# Altium PCB 手电钻驱动板V0.1.PcbDoc
Units mil, origin at the board's own origin, x right, y up, seen from the top; angles counter-clockwise.
Board outline 3150 x 2425 mil, 2 copper layers (Top Layer, Bottom Layer); 105 components, 65 nets, 308 pads, 195 vias.
Unrouted connection lines stored in the file: 1.
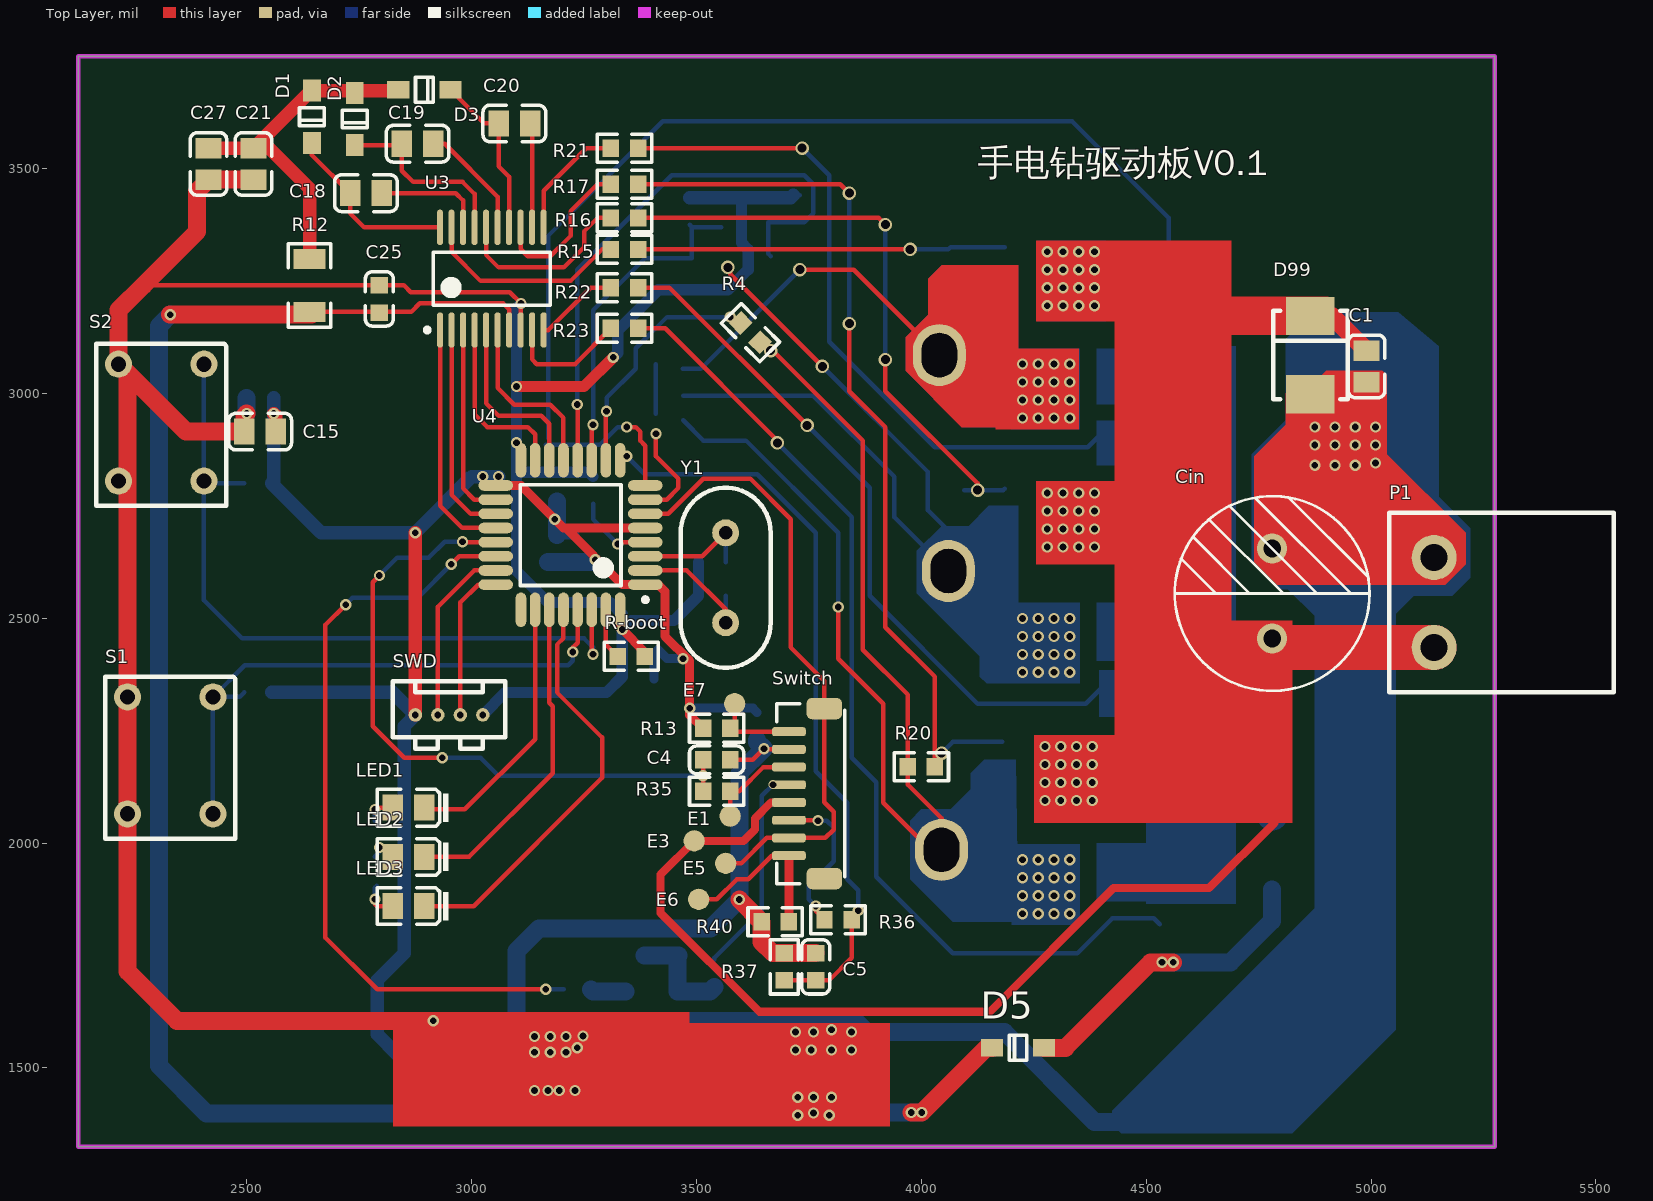
[diagram p0: Top Layer view]
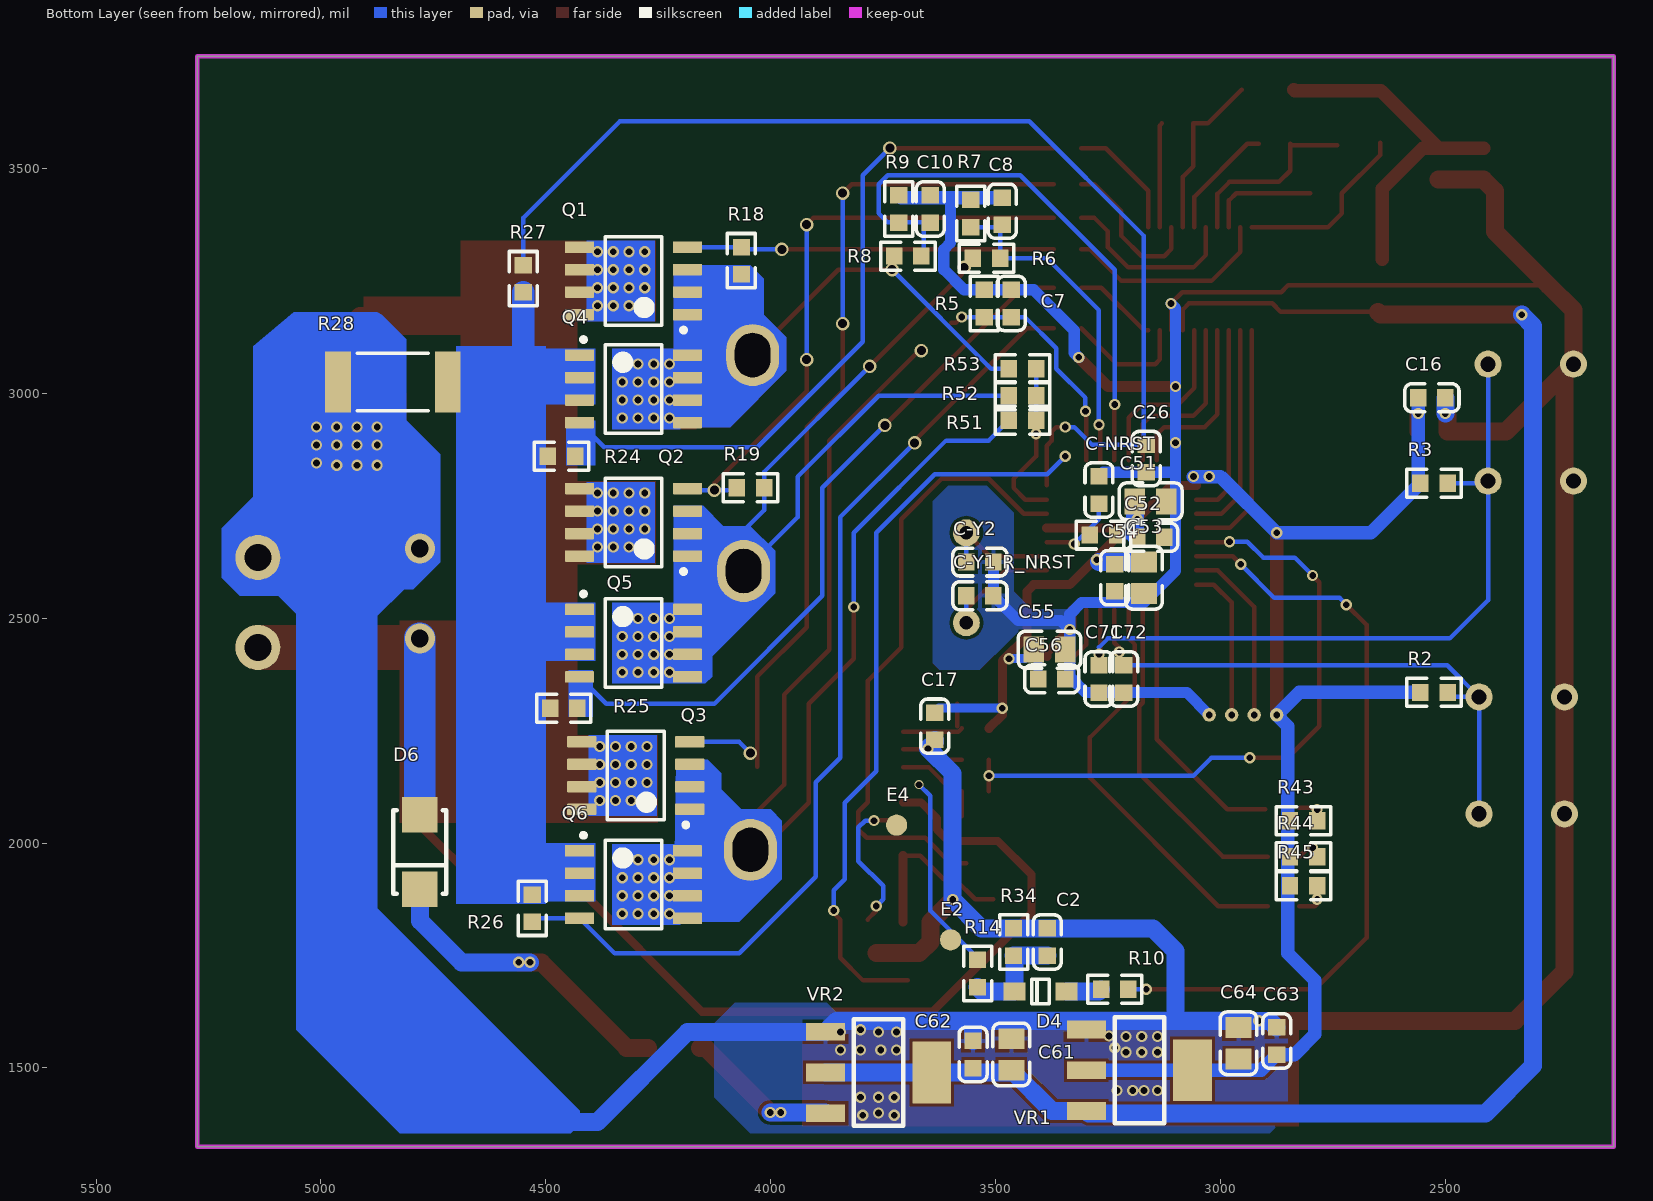
[diagram p1: Bottom Layer view, seen from below]
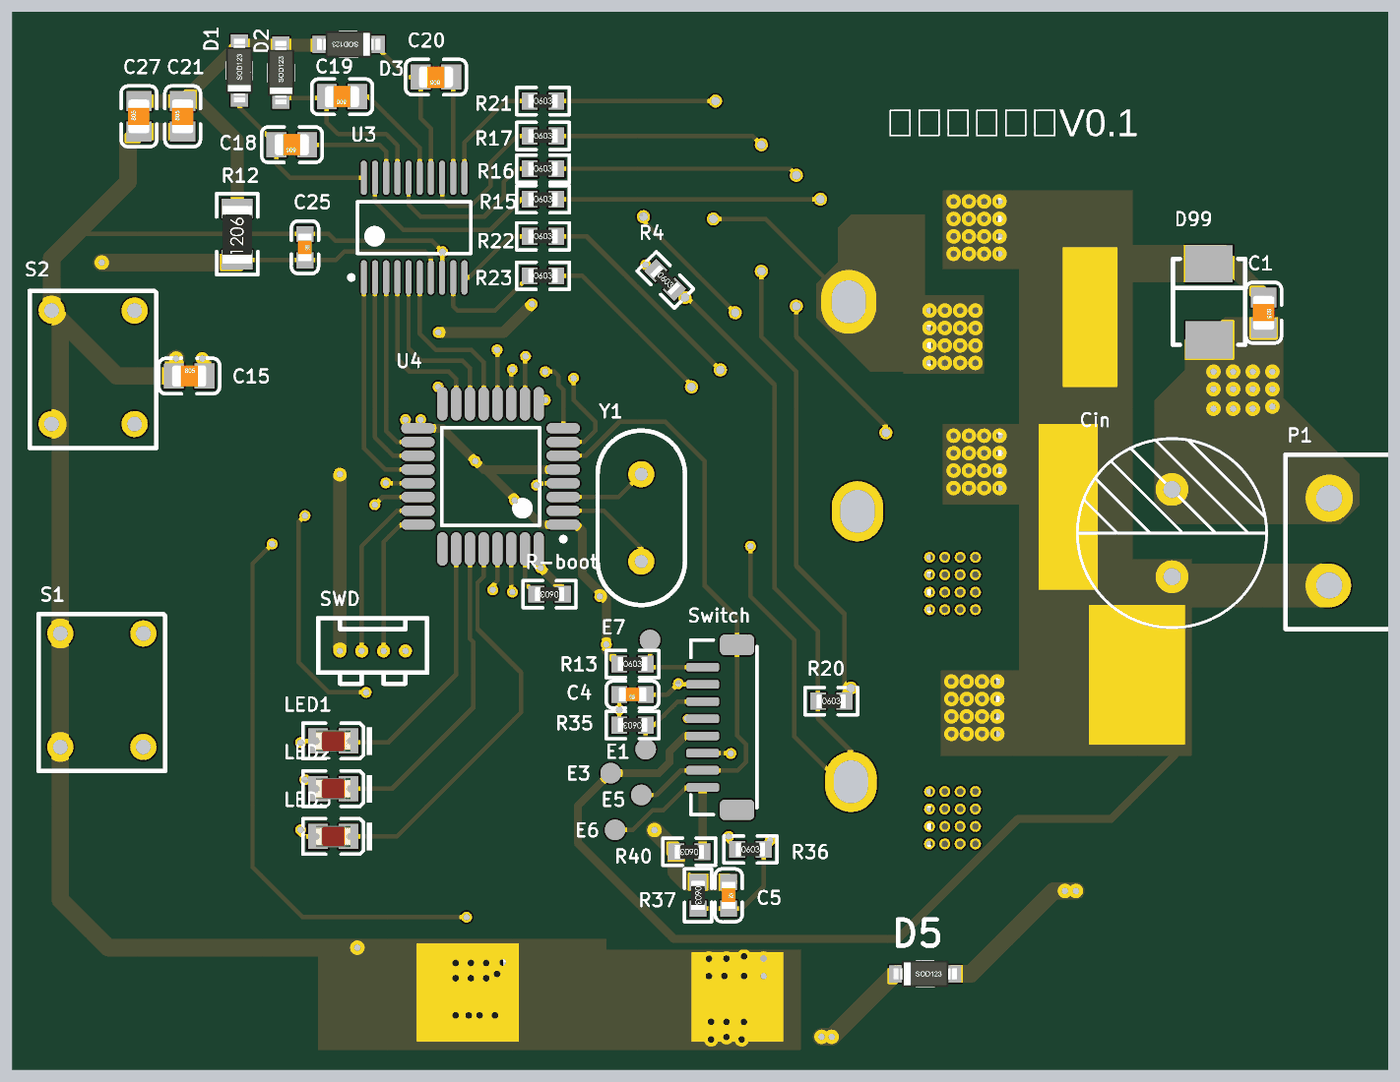
[diagram p2: 3D render of the assembled board from above, using the file's embedded part models]
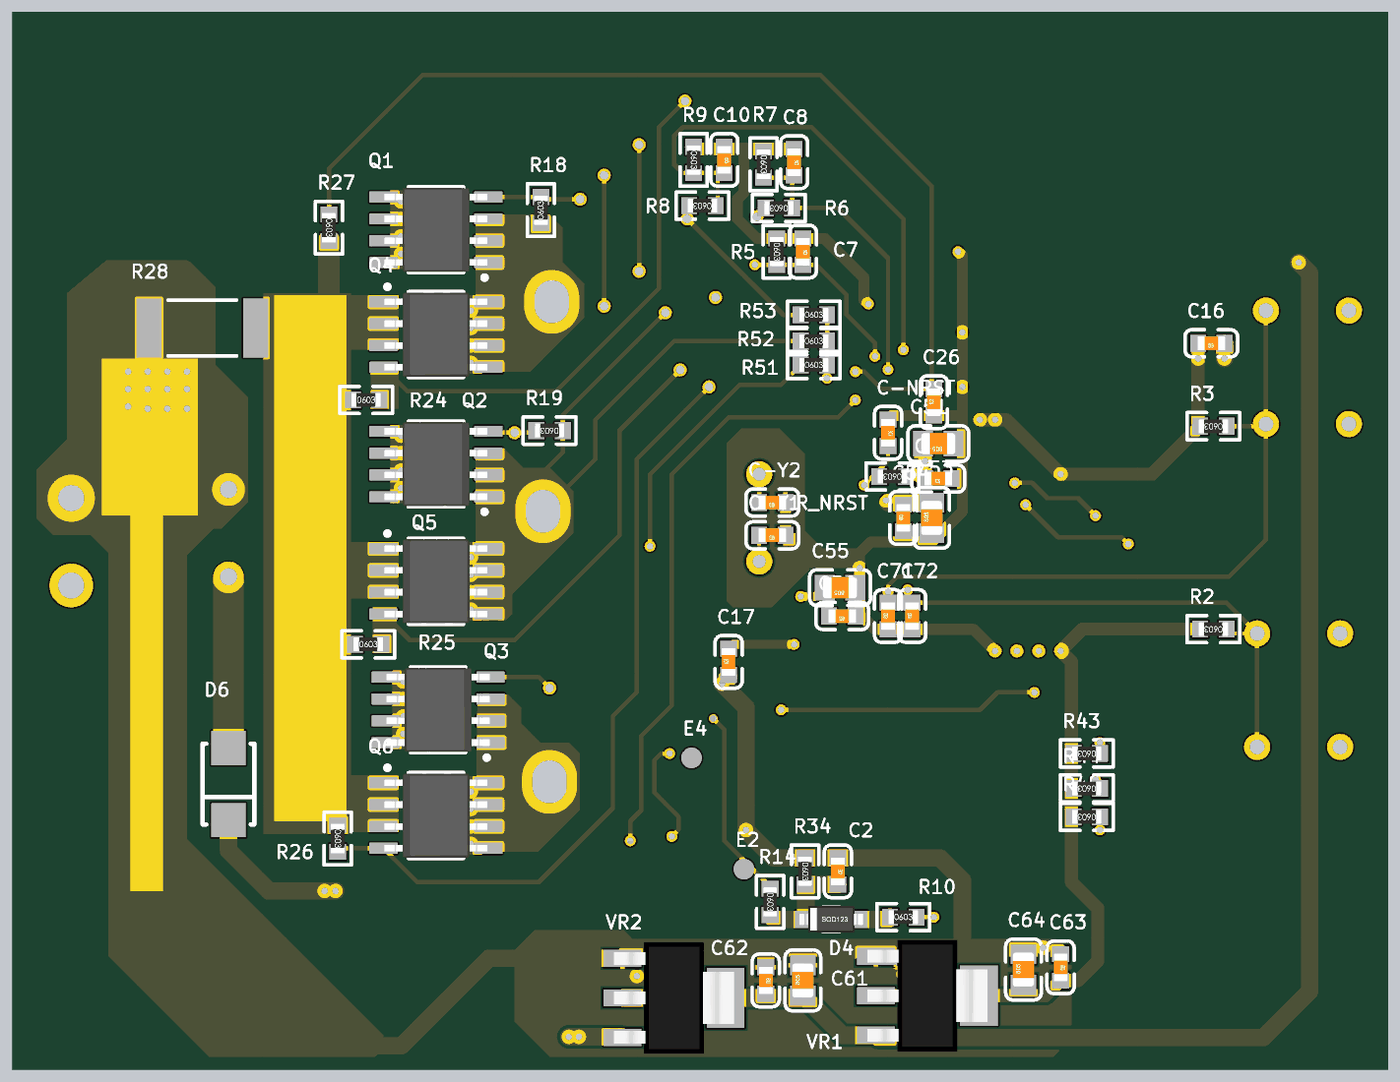
[diagram p3: 3D render of the assembled board from below, using the file's embedded part models]

## Layer stack, top to bottom
Top Layer: signal copper 1.4
Dielectric: dielectric 12.6, FR-4, Dk 4.8
Bottom Layer: signal copper 1.4

## Board outline
2125,1325 2125,3750 5275,3750 5275,1325

## Design rules (kind name [scope] priority, off if disabled: settings)
Clearance [All] p1: gap=7
PolygonConnect [All] p1: connectstyle=Relief reliefconductorwidth=10 reliefentries=4 polygonreliefangle="90 Angle"
RoutingVias [All] p1: holewidth=28 width=50 viastyle="Through Hole" minholewidth=28 minwidth=50 maxholewidth=28 maxwidth=50
SilkscreenOverComponentPads [IsPad] p1: minsilkscreentomaskgap=10
SolderMaskExpansion [All] p1: expansion=4
Width [All] p1: maxlimit=100 minlimit=10 preferedwidth=10 minimp=50.000000 maximp=50.000000 favimp=50.000000
27 further rules are at their usual default settings.

## Classes and differential pairs
component class U_Switch: C2 C4 C5 C17 D4 E1 E2 E3 E4 E5 E6 E7 R10 R13 R14 R34 R35 R36 R37 R40 Switch
component class U_POWER: C1 C61 C62 C63 C64 Cin D5 D6 D99 P1 VR1 VR2
component class U_MotoDriver: C7 C8 C10 C18 C19 C20 C21 C25 C26 C27 D1 D2 D3 Q1 Q2 Q3 Q4 Q5 Q6 R4 R5 R6 R7 R8 R9 R12 R15 R16 R17 R18 R19 R20 R21 R22 R23 R24 R25 R26 R27 R28 R51 R52 R53 U3
component class U_MCU_STM32: C51 C52 C53 C54 C55 C56 C-NRST C-Y1 C-Y2 R-boot R_NRST SWD U4 Y1
component class U_LED: LED1 LED2 LED3 R43 R44 R45
component class U_Key: C15 C16 C71 C72 R2 R3 S1 S2

## Components (designator, comment, footprint, x,y, rotation, side; value= is the part's Value field where it differs from the comment)
C1 "10uF 10% 50V" 0805_C 4990,3060 r270 top
C2 "0.1uF 10% 50V" 0603_C 3385,1780 r270 bottom
C4 "0.1uF 10% 50V" 0603_C 3545,2185 r180 top
C5 "0.1uF 10% 50V" 0603_C 3765,1725 r270 top
C7 "0.1uF 10% 50V" 0603_C 3465,3200 r270 bottom
C8 "0.1uF 10% 50V" 0603_C 3485,3405 r270 bottom
C10 "0.1uF 10% 50V" 0603_C 3645,3410 r270 bottom
C15 "10uF 10% 50V" 0805_C 2530,2915 r0 top
C16 "0.1uF 10% 50V" 0603_C 2530,2990 r0 bottom
C17 "0.1uF 10% 50V" 0603_C 3635,2260 r90 bottom
C18 "1uF 10% 50V" 0805_C 2765,3445 r180 top
C19 "1uF 10% 50V" 0805_C 2880,3555 r180 top
C20 "1uF 10% 50V" 0805_C 3095,3600 r180 top
C21 "10uF 10% 50V" 0805_C 2515,3510 r90 top
C25 "0.1uF 10% 50V" 0603_C 2795,3210 r270 top
C26 "0.1uF 10% 50V" 0603_C 3165,2855 r90 bottom
C27 "10uF 10% 50V" 0805_C 2415,3510 r90 top
C51 "10uF 10% 50V" 0805_C 3155,2760 r0 bottom
C52 "0.1uF 10% 50V" 0603_C 3155,2680 r0 bottom
C53 "10uF 10% 50V" 0805_C 3170,2590 r90 bottom
C54 "0.1uF 10% 50V" 0603_C 3235,2590 r90 bottom
C55 "10uF 10% 50V" 0805_C 3380,2430 r0 bottom
C56 "0.1uF 10% 50V" 0603_C 3375,2365 r0 bottom
C61 "10uF 10% 50V" 0805_C 3465,1530 r90 bottom
C62 "0.1uF 10% 50V" 0603_C 3550,1530 r270 bottom
C63 "0.1uF 10% 50V" 0603_C 2875,1560 r270 bottom
C64 "10uF 10% 50V" 0805_C 2960,1555 r90 bottom
C71 "0.1uF 10% 50V" 0603_C 3270,2365 r90 bottom
C72 "0.1uF 10% 50V" 0603_C 3215,2365 r90 bottom
C-NRST "0.1uF 10% 50V" 0603_C 3270,2785 r270 bottom
C-Y1 "22pF 10% 50V" 0603_C 3535,2550 r0 bottom
C-Y2 "22pF 10% 50V" 0603_C 3535,2625 r0 bottom
Cin "330uF 35V电解电容" 330uf/35V 4780,2455 r90 top
D1 "1N5819W  SL" SOD-123 2645,3615 r90 top
D2 "1N5819W  SL" SOD-123 2740,3610 r90 top
D3 "1N5819W  SL" SOD-123 2895,3675 r180 top
D4 "1N5819W  SL" SOD-123 3400,1670 r180 bottom
D5 "1N5819W  SL" SOD-123 4215,1545 r0 top
D6 "ES2JA" SMA(DO-214AC)_S1 4780,1980 r90 bottom
D99 "SMBJ 240A" SMB(DO-214AA)_S1 4865,3085 r270 top
E1 "测试点" Test 3575,2060 r0 top
E2 "测试点" Test 3600,1785 r180 bottom
E3 "测试点" Test 3495,2005 r0 top
E4 "测试点" Test 3720,2040 r180 bottom
E5 "测试点" Test 3565,1955 r0 top
E6 "测试点" Test 3505,1875 r0 top
E7 "测试点" Test 3585,2310 r0 top
LED1 "翠绿 0805" 0805_LED_S1 2860,2078.7 r180 top
LED2 "翠绿 0805" 0805_LED_S1 2860,1969.33 r180 top
LED3 "翠绿 0805" 0805_LED_S1 2860,1859.96 r180 top
P1 "Header 2" 2星座子 5140,2635 r270 top
Q1 "TPCA8057-H" TPCA8057-H 4305,3250 r0 bottom
Q2 "TPCA8057-H" TPCA8057-H 4305,2713.23 r0 bottom
Q3 "TPCA8057-H" TPCA8057-H 4300,2150 r0 bottom
Q4 "TPCA8057-H" TPCA8057-H 4305,3010 r180 bottom
Q5 "TPCA8057-H" TPCA8057-H 4305,2444.65 r180 bottom
Q6 "TPCA8057-H" TPCA8057-H 4305,1907.87 r180 bottom
R2 "4.7KΩ ±10%" 0603_R 2525,2335 r0 bottom
R3 "4.7KΩ ±10%" 0603_R 2525,2800 r0 bottom
R4 "20KΩ ±1%" 0603_R 3620,3135 r315 top
R5 "2.4KΩ ±1%" 0603_R 3525,3200 r270 bottom
R6 "20KΩ ±1%" 0603_R 3520,3300 r0 bottom
R7 "2.4KΩ ±1%" 0603_R 3555,3400 r270 bottom
R8 "20KΩ ±1%" 0603_R 3695,3305.32 r0 bottom
R9 "2.4KΩ ±1%" 0603_R 3715,3410 r270 bottom
R10 "81Ω ±1%" 0603_R 3235,1675 r180 bottom
R12 "511Ω ±1%" 1206_R 2640,3240 r90 top
R13 "100Ω ±1%" 0603_R 3545,2255 r0 top
R14 "51KΩ ±10%" 0603_R 3540,1710 r270 bottom
R15 "51Ω ±1%" 0603_R 3340,3320 r0 top
R16 "51Ω ±1%" 0603_R 3340,3390 r0 top
R17 "51Ω ±1%" 0603_R 3340,3465 r0 top
R18 "100KΩ ±10%" 0603_R 4065,3295 r90 bottom
R19 "100KΩ ±10%" 0603_R 4045,2790 r0 bottom
R20 "100KΩ ±10%" 0603_R 4000,2170 r0 top
R21 "51Ω ±1%" 0603_R 3340,3545 r0 top
R22 "51Ω ±1%" 0603_R 3340,3235 r0 top
R23 "51Ω ±1%" 0603_R 3340,3144.61 r0 top
R24 "100KΩ ±10%" 0603_R 4465,2860 r180 bottom
R25 "100KΩ ±10%" 0603_R 4460,2300 r180 bottom
R26 "100KΩ ±10%" 0603_R 4530,1855 r270 bottom
R27 "81Ω ±1%" 0603_R 4550,3255 r270 bottom
R28 "0.002Ω ±1%" RESC2512(6432)_M 4840,3025 r180 bottom
R34 "10KΩ ±10%" 0603_R 3460,1780 r270 bottom
R35 "81Ω ±1%" 0603_R 3545,2115 r180 top
R36 "81Ω ±1%" 0603_R 3815,1830 r0 top
R37 "1MΩ ±10%" 0603_R 3695,1725 r270 top
R40 "81Ω ±1%" 0603_R 3675,1825 r180 top
R43 "270Ω ±10%" 0603_R 2815,2050 r0 bottom
R44 "270Ω ±10%" 0603_R 2815,1970 r0 bottom
R45 "270Ω ±10%" 0603_R 2815,1905 r0 bottom
R51 "20KΩ ±1%" 0603_R 3440,2940 r180 bottom
R52 "20KΩ ±1%" 0603_R 3440,2995 r180 bottom
R53 "20KΩ ±1%" 0603_R 3440,3055 r180 bottom
R-boot "10KΩ ±10%" 0603_R 3355,2415 r180 top
R_NRST "10KΩ ±10%" 0603_R 3260,2685 r0 bottom
S1 "SW-DPST" SW1 2235,2325 r0 top
S2 "SW-DPST" SW1 2215,3065 r0 top
SWD "Header 4" FPC_1.25_4P 3025,2285 r180 top
Switch "Header 8" SH1.0mm-8P 3745,2110 r90 top
U3 "FD6288T" TSSOP20_M 3045,3255 r90 top
U4 "STM32F030K6T6" STM-LQFP32_M 3220,2685 r180 top
VR1 "AMS1117-5.0" SOT-223 3180,1495 r0 bottom
VR2 "AMS1117-5.0" SOT-223 3760,1490 r0 bottom
Y1 "8M" XTAL 3565,2590 r90 top

## Footprints (in the part's own frame and the unit in brackets; to place one, negate y for a bottom-side part, rotate by r counter-clockwise, add the part's x,y. Pads: shape width x height; smd on the part's side, far side on the other; paste and mask are expansions set on the pad)
2星座子 [mil]
  round 100 hole 60: 1(0,0) 2(200,0)
  silkscreen extent -100,-100 300,400
330uf/35V [mm]
  round 1.7 hole 1: 1(0,0) 2(5.08,0)
  silkscreen extent -2.96,-5.5 8.04,5.5
0603_C [mm]
  rect 0.93x0.98 smd: 1(-0.77,0) 2(0.77,0)
  silkscreen extent -1.53,-0.79 1.54,0.79, body extent -0.8,-0.4 0.8,0.4, height 0.3
0603_R [mm]
  rect 0.93x0.98 smd: 1(-0.77,0) 2(0.77,0)
  silkscreen extent -1.53,-0.79 1.54,0.79, body extent -0.85,-0.4 0.85,0.4, height 0.56
0805_C [mm]
  rect 1.16x1.47 smd: 1(-0.89,0) 2(0.89,0)
  silkscreen extent -1.77,-1.04 1.77,1.04, body extent -1,-0.63 1,0.63, height 0.77
0805_LED_S1 [mm]
  rect 1.16x1.47 smd: A(0.89,0) K(-0.89,0)
  silkscreen extent -2.25,-1.04 1.77,1.03, body extent -1.01,-0.63 1.01,0.62, height 1.1
1206_R [mm]
  rect 1.13x1.8 smd: 1(-1.49,0) 2(1.49,0)
  silkscreen extent -2.36,-1.2 2.35,1.2, body extent -1.7,-0.86 1.65,0.87, height 0.85
FPC_1.25_4P [mil]
  round 30 hole 15: 1(0,0) 2(50,0) 3(100,0) 4(150,0)
  silkscreen extent -50,-75 200,75
RESC2512(6432)_M [mm] "Chip Resistor, Body 6.4x3.2mm, IPC Low Density"
  rect 1.45x3.45 smd: 1(-3.1,0) 2(3.1,0)
  silkscreen extent -2,-1.63 2,1.63, body extent -3.25,-1.7 3.25,1.7, height 0.75
SH1.0mm-8P [mm] "Header, Wire-to-Board, SMT, Horizontal, 1-Row, Pitch 1.00mm, 2-Position"
  rrect50% 1.2x2 smd: 0(-4.8,-1) 0(4.8,-1)
  rrect50% 0.5x1.9 smd: 1(-3.5,1) 2(-2.5,1) 3(-1.5,1) 4(-0.5,1) 5(0.5,1) 6(1.5,1) 7(2.5,1) 8(3.5,1)
  silkscreen extent -5.08,-2.16 5.08,1.69
SMA(DO-214AC)_S1 [mm]
  rect 2x2 smd: 1(2.1,0) 2(-2.1,0)
  silkscreen extent -2.35,-1.5 2.35,1.5
SMB(DO-214AA)_S1 [mil]
  rect 85x107.99 smd: 1(87.01,0) 2(-87.01,0)
  silkscreen extent -98,-83 98,83
SOD-123 [mm]
  rect 1.25x1 smd: 1(1.475,0) 2(-1.475,0)
  silkscreen extent -0.5,-0.7 0.5,0.7, body extent -1.85,-0.77 1.85,0.78, height 1.35
SOT-223 [mm]
  rect 2.2x1 smd: 1(3,-2.3) 2(3,0) 3(3,2.3)
  rect 2.2x3.5 smd: 2(-3,0)
  silkscreen extent -1.4,-3 1.4,3, body extent -3.49,-3.24 3.49,3.24, height 1.64
STM-LQFP32_M [mm] "QFP, 32-Leads, Body 7x7mm, Pitch 0.8mm, IPC Low Density"
  oval 1.95x0.6 smd: 1(-4.225,2.8) 2(-4.225,2) 3(-4.225,1.2) 4(-4.225,0.4) 5(-4.225,-0.4) 6(-4.225,-1.2) 7(-4.225,-2) 8(-4.225,-2.8) 17(4.225,-2.8) 18(4.225,-2) 19(4.225,-1.2) 20(4.225,-0.4) 21(4.225,0.4) 22(4.225,1.2) 23(4.225,2) 24(4.225,2.8)
  oval 0.6x1.95 smd: 9(-2.8,-4.225) 10(-2,-4.225) 11(-1.2,-4.225) 12(-0.4,-4.225) 13(0.4,-4.225) 14(1.2,-4.225) 15(2,-4.225) 16(2.8,-4.225) 25(2.8,4.225) 26(2,4.225) 27(1.2,4.225) 28(0.4,4.225) 29(-0.4,4.225) 30(-1.2,4.225) 31(-2,4.225) 32(-2.8,4.225)
  silkscreen extent -4.35,-2.85 2.85,3.77, body extent -3.5,-3.5 3.5,3.5, height 1.6
SW1 [mil]
  round 60 hole 34: 1(0,-260) 2(190,-260) 3(0,0) 4(190,0)
  silkscreen extent -50,-315 240,45
Test [mm] "Test"
  round 1.2 smd: 1(0,0)
TPCA8057-H [mm] "SOIC, 8-Leads, Body 5x5mm, Pitch 1.27mm, IPC Low Density"
  rrect15% 1.65x0.65 smd: 1(-3.048,1.905) 2(-3.048,0.635) 3(-3.048,-0.635) 4(-3.048,-1.905) 5(3.048,-1.905) 6(3.048,-0.635) 7(3.048,0.635) 8(3.048,1.905)
  Top Layer region: -1.214,2.286 2.667,2.286 2.667,-2.286 -1.214,-2.286
  silkscreen extent -2.95,-2.5 1.6,2.9, body extent -3,-2.45 3,2.45, height 1.63
TSSOP20_M [mm] "TSOP, 20-Leads, Body 6.5x4.4mm, Pitch 0.65mm, IPC Low Density"
  oval 2x0.35 smd: 1(-2.9,2.925) 2(-2.9,2.275) 3(-2.9,1.625) 4(-2.9,0.975) 5(-2.9,0.325) 6(-2.9,-0.325) 7(-2.9,-0.975) 8(-2.9,-1.625) 9(-2.9,-2.275) 10(-2.9,-2.925) 11(2.9,-2.925) 12(2.9,-2.275) 13(2.9,-1.625) 14(2.9,-0.975) 15(2.9,-0.325) 16(2.9,0.325) 17(2.9,0.975) 18(2.9,1.625) 19(2.9,2.275) 20(2.9,2.925)
  silkscreen extent -3.02,-3.3 1.5,3.77, body extent -2.25,-3.3 2.25,3.3, height 1.2
XTAL [mil]
  round 60 hole 30: 1(-100,0) 2(100,0)
  silkscreen extent -200,-100 200,100

## Part data
C1 C61 C62 C63 C64: library part "Cap Semi", "Capacitor (Semiconductor SIM Model)"
C2 C4 C5 C7 C8 C10 C15 C16 C17 C25 C26 C27 C52 C54 C56 C71 C72 C-NRST C-Y1 C-Y2: library part "0603 4.7uF (475) 10% 16V", "贴片电容"
C18 C19 C20 C21 C51 C53 C55: library part "0805 1uF (105) 10% 50V", "贴片电容"
Cin: library part "Cap Pol1", "Polarized Capacitor (Radial)"
D1 D2 D3 D4 D5: library part "SOD-123 B5819W  SL", "肖特基二极管"
D6: library part "SMA(DO-214AC) M7", "二极管"
D99: library part "SMB/DO-214AA P6SMB6.8CA", "TVS"
E1 E2 E3 E4 E5 E6 E7: library part Antenna, "Generic Antenna"
LED1 LED2 LED3: library part "0805 翠绿", "发光二极管"
P1: "Header, 2-Pin"
Q1 Q2 Q3 Q4 Q5 Q6: "MOSFETsSilicon N-Channel MOS (U-MOSªÓ-H)"
R2 R3 R4 R5 R6 R7 R8 R9 R10 R13 R14 R15 R16 R17 R18 R19 R20 R21 R22 R23 R24 R25 R26 R27 R28 R34 R35 R36 R37 R40 R43 R44 R45 R51 R52 R53 R-boot R_NRST: library part "0603 2.2Ω (2R20) 1%", "贴片电阻"
R12: library part "0402 51Ω (51R0) 1%", "贴片电阻"
S1 S2: "Double-Pole, Single-Throw Switch"
SWD: "Header, 4-Pin"
Switch: "Header, 8-Pin"
U3: "USB to TTL Serial / UART"
U4: library part MC-ARM-STM32F030-SQ32
VR1 VR2: library part "SOT-223 AMS1117-5.0", "低压差线性稳压(LDO)"
Y1: library part XTAL, "Crystal Oscillator"

## Free pads (board coordinates)
  oval 118.11x137.8 hole 78.74 slot 98.43 at 90 deg: 0(4040,3085) 0(4045,1985) 0(4060,2605)

## Via types
v1: diameter 25, hole 15, Top Layer to Bottom Layer, 180 vias
v2: diameter 30, hole 20, Top Layer to Bottom Layer, 14 vias
v3: diameter 20, hole 15, Top Layer to Bottom Layer, 1 vias

## Nets (pads, with @x,y where several pads share a name; then routed paths per layer and width w, separated by ;. In a path a pad name is that pad's centre, name@x,y a point inside that pad or via, vN(x,y) a via of type N, cw(c..) or ccw(c..) an arc to the next point about the centre after c; other vN are vias at no path point)
3v3: C15.2 C16.2 C17.2 C51.2 C52.2 C53.2 C54.2 C55.2 C56.2 C63.2 C64.1 R2.2 R3.2 R13.1 R43.2 R44.2 R45.2 R_NRST.1 SWD.4 U4.1 U4.5 U4.17 VR1.2 | length 4362
  Top Layer w20: U4.17 3109.76,2795.24 v1(3185,2720) 3204.25,2700.75 ; U4.5 3209.25,2700.75 3335.24,2574.76 U4.1 3415.24,2574.76 3430,2560 3430,2460 3485,2405 v1(3485,2300) 3485,2284.69 R13.1
  Top Layer w30: v1(2560,2955) 2565.04,2949.96 C15.2 ; SWD.4 v1(2875,2690)
  Bottom Layer w20: C52.2 3190.04,2684.72 3190.32,2685 R_NRST.1 ; C56.2 3405.32,2420.28 C55.2 3435.04,2410 v1(3470,2410) ; v1(3485,2300) 3625.32,2300 C17.2
  Bottom Layer w30: R2.2 2825,2335 SWD.4 2850,2260 2850,1755 2790,1695 2790,1575 2835.32,1529.68 C63.2 2909.68,1495 3061.89,1495 VR1.2@3298.11,1495 ; C16.2 2560.32,2805 R3.2 2665.32,2690 v1(2875,2690) 3000,2815 v1(3025,2815) v1(3060,2815)
  Bottom Layer w40: C53.2 v1@3270.04,2625.04 ; C52.2@3190.04,2684.72 C51.2
  other v1: 3275,2630
CURRENT_AD: C26.2 R27.1 U4.8 | length 2484.4
  Top Layer w10: v1(3345,2925) 3365,2925 3375,2915 3375,2895 3386.34,2883.66 U4.8
  Bottom Layer w10: C26.2 3285.32,2885.32 3325,2925 v1(3345,2925) ; C26.2@3170,2900 3170,3350 3425,3605 4335,3605 4550,3390 R27.1
GND: C1.2 C2.1 C4.1 C5.1 C7.1 C8.1 C10.1 C15.1 C16.1 C17.1 C21.1 C25.1 C26.1 C27.1 C51.1 C52.1 C53.1 C54.1 C55.1 C56.1 C61.2 C62.1 C63.1 C64.2 C71.1 C72.1 C-NRST.1 C-Y1.1 C-Y2.1 Cin.2 D99.1 P1.1 R5.1 R7.1 R9.1 R28.1 R34.1 R37.1 R40.2 R-boot.1 S1.1 S1.3 S2.1 S2.3 SWD.1 Switch.7 U3.8 U4.16 U4.32 VR1.1 VR2.1 | length 10314.8
  Top Layer w10: 2270.32,3240.32 C25.1 2849.68,3240.32 2865,3225 3085,3225 v1(3110,3200) 3108.98,3198.98 U3.8 ; C4.1 3625,2185 v1@3648.42,2208.42 ; v1@3650,2208.42 Switch.7
  Top Layer w20: U4.32 3330.24,2479.76 v1(3335,2475) 3385.31,2424.69 R-boot.1
  Top Layer w25: v1(3100,3015) 3250,3015 v1(3315,3080)
  Top Layer w40: v1(2500,2955) 2494.96,2949.96 C15.1 2365,2915 S2.3@2235,3045 ; C21.1 C27.1 2390,3449.96 2390,3360 2270.32,3240.32 2215,3185 S2.3 S2.3@2235,3045 ; v1(2915,1605) 2345,1605 2235,1715 S1.1 S1.3 S2.3@2235,3045 ; v1(3595.2,1874.49) R40.2 3644.68,1780.32 3669.68,1755.32 C5.1 ; D99.1 4963.03,2997.99 C1.2
  Bottom Layer w10: C8.1 C8.1@3490,3430.31 ; R9.1@3715,3440.63 R9.1@3730,3440.63
  Bottom Layer w25: SWD.1 3074.68,2334.68 C72.1 C71.1 3299.68,2334.68 3335,2370 v1(3335,2475) ; v1(3110,3200) 3100,3190 v1(3100,3015) v1(3100,2890) 3100,2830 ; C-NRST.1 3260.63,2824.68 C26.1 3105.32,2824.68 3100,2830 ; v1(3315,3080) 3325,3090 3325,3140 3415.32,3230.32 C7.1 3570.32,3230.32 3615,3275 3615,3320 3600,3335 3600,3435.32 ; C-Y2.1 C-Y1.1 3449.68,2495 3355,2495 v1(3335,2475) ; 3100,2830 3100,2605 3170,2535 3308.66,2535 3335,2508.66 v1(3335,2475)
  Bottom Layer w30: C8.1 3600,3435.32 3710,3435.32 R9.1
  Bottom Layer w40: v1@2499.68,2955.32 C16.1 ; C63.1 2889.68,1605 v1(2915,1605) 3100,1605 ; C62.1 3550,1600 3545,1605 ; C17.1 3635,2225 v1(3650,2210) 3595.2,2155.2 v1(3595.2,1874.49) 3531.02,1810.31 R34.1 C2.1 3150.32,1810.32 3100,1760 3100,1605 ; 4450,1380 4385,1380 4184.45,1580.55 VR2.1 3853.66,1605 3800,1605 3545,1605 ; 3100,1605 3545,1605
  other v1: 3725,1395 3795,1395 3760,1400 3725,1435 3760,1435 3800,1435 3140,1450 3170,1450 3195,1450 3230,1450 3140,1535 3175,1535 3210,1535 3720,1540 3755,1540 3800,1540 3845,1540 3235,1545 3140,1570 3175,1570 3210,1570 3247.8,1570.9 3720,1580 3760,1580 3845,1580 3800,1585 4875,2840 4920,2840 4965,2840 5010,2845 4875,2885 4920,2885 4965,2885 5010,2885 4875,2925 4920,2925 4965,2925 5010,2925
GND1: Q4.1 Q4.2 Q4.3 Q5.1 Q5.2 Q5.3 Q6.1 Q6.2 Q6.3 R24.1 R25.1 R26.1 R27.2 R28.2 | length 144.7
  Bottom Layer w50: 4550,3080 R27.2
HIN1: U3.1 U4.20 | length 535
  Top Layer w10: U3.1 2929.84,2750.16 2979.25,2700.75 U4.20
HIN2: U3.2 U4.19 | length 482
  Top Layer w10: U3.2 2955.43,2774.57 2997.76,2732.24 U4.19
HIN3: U3.3 U4.18 | length 434.9
  Top Layer w10: U3.3 2981.02,2788.98 3006.26,2763.74 U4.18
HO1: R15.1 U3.19 | length 464.6
  Top Layer w10: U3.19 2955.43,3314.57 3020,3250 3220,3250 3290,3320 R15.1
HO2: R16.1 U3.16 | length 416.4
  Top Layer w10: U3.16 3032.2,3307.8 3060,3280 3205,3280 3250,3325 3250,3360 3280,3390 R16.1
HO3: R17.1 U3.13 | length 354
  Top Layer w10: U3.13 3108.98,3321.02 3125,3305 3175,3305 3220,3350 3220,3405 3280,3465 R17.1
KEY1: C72.2 R2.1 S1.2 S1.4 U4.29 | length 1274.9
  Top Layer w10: v1@3225,2435 3235.75,2445.75 U4.29
  Bottom Layer w10: S1.2 S1.4 ; R2.1 2484.69,2325 S1.4 ; v1(3225,2425) 3225,2405.32 C72.2 2495.32,2395.32 S1.4
KEY2: C71.2 R3.1 S2.2 S2.4 U4.30 | length 1621.2
  Top Layer w10: v1@3267.24,2422.76 U4.30
  Bottom Layer w10: S2.4 S2.2 ; R3.1 2410,2800 S2.2 ; 3270,2435 3250,2455 2490,2455 2405,2540 S2.2
  other v1: 3270,2420
LED1: LED1.K U4.26 | length 593.4
  Top Layer w10: LED1.K@2900,2075 2985,2075 3141.26,2231.26 U4.26
LED2: LED2.K U4.27 | length 729.1
  Top Layer w10: LED2.K 2994.33,1969.33 3180.67,2155.67 3180.67,2304.33 3172.76,2312.24 U4.27
LED3: LED3.K U4.28 | length 934
  Top Layer w10: LED3.K 3004.96,1859.96 3290.04,2145.04 3290.04,2234.96 3190,2335 3190,2441.5 3204.25,2455.75 U4.28
LED_CTRL: E5.1 Switch.0@3784.37,2298.98 Switch.2 U4.6 | length 1393.6
  Top Layer w10: U4.6 3437.24,2732.24 3515,2810 3620,2810 3710,2720 3710,2435 3784.37,2360.63 3784.37,2298.98 3784.37,2090.63 3805,2070 3805,2030 3786.57,2011.57 Switch.2 3656.57,2011.57 3600,1955 E5.1
LIN1: U3.4 U4.15 | length 398
  Top Layer w10: U3.4 3006.61,2953.39 3035,2925 3125,2925 3141.26,2908.74 U4.15
LIN2: U3.5 U4.14 | length 403.4
  Top Layer w10: U3.5 3032.2,2977.8 3060,2950 3155,2950 3172.76,2932.24 U4.14
LIN3: U3.6 U4.13 | length 397
  Top Layer w10: U3.6 3057.8,3012.2 3095,2975 3175,2975 3204.25,2945.75 U4.13
LO1: R21.1 U3.11 | length 269.8
  Top Layer w10: U3.11 3160.16,3450.16 3255,3545 R21.1
LO2: R22.1 U3.10 | length 188.5
  Top Layer w10: U3.10 3170.83,3140.83 3265,3235 R22.1
LO3: R23.1 U3.9 | length 277.8
  Top Layer w10: U3.9 3134.57,3075.43 3145,3065 3230.08,3065 R23.1
MID_AD: R51.2 R52.2 R53.2 U4.7 | length 335.5
  Top Layer w10: U4.7 3433.74,2763.74 3460,2790 3460,2810 3410,2860 v1(3410,2910)
  Bottom Layer w10: R51.2@3409.68,2954.72 R52.2 R53.2 R53.2@3409.68,3065
MOTO_AD_A: C7.2 R4.1 R5.2 U4.10 | length 543.8
  Top Layer w10: U4.10 3298.74,2958.74 v1(3300,2960) ; v1(3575,3170) 3588.56,3156.44 R4.1
  Bottom Layer w10: v1(3300,2960) 3300,2990 3365,3055 3365,3100 3434.68,3169.68 R5.2 v1@3574.68,3169.68
MOTO_AD_B: C8.2 R6.1 R7.2 U4.11 | length 743.7
  Top Layer w10: U4.11 3267.24,2927.24 v1(3270,2930)
  Bottom Layer w10: v1(3270,2930) 3270,3185 3385,3300 R6.1 3489.69,3370 C8.2 ; C8.2@3490,3369.68 R7.2
MOTO_AD_C: C10.2 R8.1 R9.2 U4.12 | length 1284.2
  Top Layer w10: v1@3235,2965 3235.75,2964.25 U4.12
  Bottom Layer w10: v1(3235,2975) 3235,3275 3445,3485 3740,3485 3760,3465 3760,3400 3740,3380 3730,3380 3660,3380 3660,3310 R8.1
NetC2_2: C2.2 D4.2 R14.2 R34.2 | length 241.4
  Bottom Layer w40: C2.2 R34.2 3458.07,1747.76 D4.2 3530.32,1670 R14.2
NetC-Y1_2: C-Y1.2 U4.2 Y1.1 | length 304.5
  Top Layer w10: U4.2 3478.74,2606.26 3565,2520 Y1.1
  Bottom Layer w10: Y1.1 3565.32,2490.32 C-Y1.2
NetC-Y2_2: C-Y2.2 U4.3 Y1.2 | length 265.4
  Top Layer w10: U4.3 3512.76,2637.76 Y1.2
  Bottom Layer w10: Y1.2 3565,2625.32 C-Y2.2
NetD4_1: D4.1 R10.1 | length 78.7
  Bottom Layer w40: R10.1 3270.31,1670 D4.1
NetD5_1: D5.1 D6.2 | length 718.9
  Top Layer w40: D5.1 4320,1545 4510,1735 v1(4560,1735)
  Bottom Layer w40: v1(4535,1735) 4687.68,1735 4780,1827.32 D6.2
NetE1_1: E1.1 R35.1 Switch.6 | length 207.8
  Top Layer w10: E1.1 3575,2114.69 R35.1 3595,2115 3649.05,2169.05 Switch.6
NetE2_1: E2.1 R14.1 Switch.5 | length 443.5
  Bottom Layer w10: R14.1 3540,1745 3645,1850 3645,2105 v3(3670,2130)
NetE4_1: E4.1 R36.1 Switch.3 | length 354.8
  Top Layer w10: Switch.3 v1@3770,2050.94 ; v1(3765,1860) 3765,1849.69 R36.1
  Bottom Layer w10: v1@3770,1865 v1(3765,1860) 3750,1875 3750,1905 3805,1960 3805,2035 3790,2050 v1(3770,2050)
NetE6_1: E6.1 R40.1 Switch.1 | length 388.2
  Top Layer w10: E6.1 3545,1875 3590,1920 3615,1920 3667.2,1972.2 Switch.1
  Top Layer w20: R40.1 3705.63,1825.32 Switch.1
NetE7_1: E7.1 R13.2 Switch.8 | length 183.3
  Top Layer w10: R13.2 3582.52,2247.79 Switch.8 ; R13.2@3585,2260 E7.1
NetLED1_A: LED1.A R43.1 | length 61.4
  Top Layer w10: v1@2788.7,2078.7 LED1.A
  Bottom Layer w10: R43.1 2785,2050.31 v1(2785,2075)
NetLED2_A: LED2.A R44.1 | length 62.8
  Top Layer w10: v1(2795,1990) 2804.29,1990 LED2.A
  Bottom Layer w10: R44.1 2795,1980.31 v1(2795,1990)
NetLED3_A: LED3.A R45.1 | length 74.4
  Top Layer w10: v1@2785,1865 2790.04,1859.96 LED3.A
  Bottom Layer w10: v1(2785,1875) 2785,1900.71 R45.1@2789.69,1905.39
NetQ1_4: Q1.4 R15.2 R18.2 | length 817
  Top Layer w10: R15.2 v2(3975,3320)
  Bottom Layer w10: v2(3975,3320) 4059.68,3320 R18.2 4184.69,3325.32 Q1.4
NetQ2_4: Q2.4 R16.2 R19.2 | length 1322.1
  Top Layer w10: R16.2 3905,3390 v2(3920,3375) ; v2(3920,3075) 3920,3005 4125,2800 v2(4125,2785)
  Bottom Layer w10: v2(3920,3075) v2(3920,3375) ; 4095,2785 v2(4125,2785) 4181.77,2785 Q2.4
NetQ3_4: Q3.4 R17.2 R20.2 | length 1977.2
  Top Layer w10: R17.2 3820,3465 v2(3840,3445) ; v2(3840,3155) 3840,3005 3920,2925 3920,2480 4030.32,2369.68 R20.2
  Bottom Layer w10: v2(3840,3155) v2(3840,3445) ; v2(4045,2200) 4070,2225 Q3.4
NetQ4_4: Q4.4 R21.2 R24.2 | length 1569.7
  Top Layer w10: R21.2 v2(3735,3545)
  Bottom Layer w10: v2(3735,3545) 3795,3485 3795,3115 4030,2880 4370,2880 Q4.4
NetQ5_4: Q5.4 R22.2 R25.2 | length 1603.1
  Top Layer w10: R22.2 3440,3235 v2(3745.98,2929.02)
  Bottom Layer w10: v2(3745.98,2929.02) 3885,2790 3885,2550 4125,2310 4365.35,2310 Q5.4
NetQ6_4: Q6.4 R23.2 R26.2 | length 2210.1
  Top Layer w10: R23.2 3430.39,3144.61 v2@3681.97,2893.03
  Bottom Layer w10: v2(3680,2890) 3845,2725 3845,2190 3900,2135 3900,1925 4070,1755 4347.13,1755 Q6.4 4516.81,1832.87 R26.2@4530,1819.68
NetR-boot_2: R-boot.2 U4.31 | length 114.4
  Top Layer w10: U4.31 3298.74,2440.94 R-boot.2
NRST: C-NRST.2 R_NRST.2 U4.4 | length 168.5
  Top Layer w10: v1(3325,2665) 3329.25,2669.25 U4.4
  Bottom Layer w10: C-NRST.2 3270,2720 v1@3320,2670
PHASE_A: pad.0@4045,1985 Q3.1 Q3.2 Q3.3 Q6.5 Q6.6 Q6.7 Q6.8 R4.2 R20.1 R51.1 | length 2533.5
  Top Layer w10: v2(3665,3095) 3670,3095 3870,2895 3870,2430 3969.69,2330.31 R20.1 3969.69,2130.31 4045,2055 4045,1985 4020,1985 3915,2090 3915,2310 3815,2410 v1(3815,2525)
  Bottom Layer w10: R51.1 3515.31,2895 3610,2895 3815,2690 v1(3815,2525)
  other v1: 4225,1842.87 4260,1842.87 4295,1842.87 4330,1842.87 4225,1882.87 4260,1882.87 4295,1882.87 4330,1882.87 4225,1922.87 4260,1922.87 4295,1922.87 4330,1922.87 4225,1962.87 4260,1962.87 4295,1962.87 4330,1962.87
PHASE_B: pad.0@4060,2605 Q2.1 Q2.2 Q2.3 Q5.5 Q5.6 Q5.7 Q5.8 R6.2 R19.1 R52.1 | length 1684.8
  Top Layer w10: v2@3570,3270 v2(3570,3280) ; v2@3575,3275 3575,3265 v2(3780,3060)
  Bottom Layer w10: R52.1 3760,2995 3940,2815 3940,2725 4060,2605 4060,2695 4014.69,2740.31 R19.1 4014.69,2825.31 v2(3780,3060)
  other v1: 4225,2379.65 4260,2379.65 4295,2379.65 4330,2379.65 4225,2419.65 4260,2419.65 4295,2419.65 4330,2419.65 4225,2459.65 4260,2459.65 4295,2459.65 4330,2459.65 4225,2499.65 4260,2499.65 4295,2499.65 4330,2499.65
PHASE_C: pad.0@4040,3085 Q1.1 Q1.2 Q1.3 Q4.5 Q4.6 Q4.7 Q4.8 R8.2 R18.1 R53.1 | length 739.8
  Top Layer w10: v2(3730,3275) 3850,3275 pad.0@4040,3085
  Bottom Layer w10: R53.1@3470,3055 R53.1 3510,3055 v2(3730,3275)
  other v1: 4225,2945 4260,2945 4295,2945 4330,2945 4225,2985 4260,2985 4295,2985 4330,2985 4225,3025 4260,3025 4295,3025 4330,3025 4225,3065 4260,3065 4295,3065 4330,3065
POWER+: C1.1 Cin.1 D6.1 D99.2 E3.1 P1.2 Q1.5 Q1.6 Q1.7 Q1.8 Q2.5 Q2.6 Q2.7 Q2.8 Q3.5 Q3.6 Q3.7 Q3.8 Switch.4 | length 3001
  Top Layer w18: Switch.4 3665.31,2090.31 3630,2055 3630,2030 3605,2005 E3.1 3420,1930 3420,1845 3640,1625 4152.43,1625 4427.43,1900 4640,1900 4785,2045
  Top Layer w40: D99.2 4913.03,3172.01 C1.1
  Top Layer w100: Cin.1@4770,2435 P1.2
  Bottom Layer w70: D6.1 Cin.1
  other v1: 4275,2095 4310,2095 4345,2095 4380,2095 4275,2135 4310,2135 4345,2135 4380,2135 4275,2175 4310,2175 4345,2175 4380,2175 4275,2215 4310,2215 4345,2215 4380,2215 4280,2658.23 4315,2658.23 4350,2658.23 4385,2658.23 4280,2698.23 4315,2698.23 4350,2698.23 4385,2698.23 4280,2738.23 4315,2738.23 4350,2738.23 4385,2738.23 4280,2778.23 4315,2778.23 4350,2778.23 4385,2778.23 4280,3195 4315,3195 4350,3195 4385,3195 4280,3235 4315,3235 4350,3235 4385,3235 4280,3275 4315,3275 4350,3275 4385,3275 4280,3315 4315,3315 4350,3315 4385,3315
SWCLK: SWD.2 U4.24 | length 345.1
  Top Layer w10: SWD.2 2975,2535 3014.76,2574.76 U4.24
SWDIO: SWD.3 U4.23 | length 402.3
  Top Layer w10: SWD.3 2925,2525 3006.26,2606.26 U4.23
SWTICH: C4.2 R35.2 U4.21 | length 1481.5
  Top Layer w10: v1(2795,2595) 2780,2580 2780,2260 2850,2190 v1(2935,2190) ; v1(2980,2670) 2980.75,2669.25 U4.21 ; R35.2 v1(3514.68,2150) C4.2
  Bottom Layer w10: v1(2795,2595) 2835,2635 2905,2635 2940,2670 v1(2980,2670) ; v1(2935,2190) 3020,2190 3060,2150 v1(3514.68,2150)
SWTICH_AD: C5.2 R36.2 R37.2 U4.9 | length 1651.8
  Top Layer w10: R37.2 3794.68,1694.68 3845.32,1745.32 R36.2 3860,1844.68 v1(3860,1850)
  Bottom Layer w10: v1(3345,2860) 3385,2820 3635,2820 3765,2690 3765,2160 3835,2090 3835,1920 3860,1895 v1(3860,1850)
SWTICH_IN: R10.2 U4.22 | length 1714.3
  Top Layer w10: v1(2720,2530) 2675,2485 2675,1790 2790,1675 v1(3165,1675) ; v1(2955,2620) 2972.76,2637.76 U4.22
  Bottom Layer w10: v1(2720,2530) 2735,2545 2880,2545 v1(2955,2620) ; v1(3165,1675) R10.2
TEST_POINT: D5.2 VR2.3 | length 362.2
  Top Layer w40: v1(3977.75,1400.82) v1(4000.82,1400.82) 4145,1545 D5.2
  Bottom Layer w40: VR2.3 3879.48,1400.82 v1(3977.75,1400.82) v1(4000.82,1400.82)
VB1: C18.2 D1.2 U3.20 | length 404.7
  Top Layer w10: D1.2 2645,3529.96 C18.2 2729.96,3400.04 2760.83,3369.17 U3.20
VB2: C19.2 D2.2 U3.17 | length 423.5
  Top Layer w10: D2.2 2841.89,3551.93 C19.2 2844.96,3495.04 2870,3470 2980,3470 3006.61,3443.39 U3.17
VB3: C20.2 D3.2 U3.14 | length 378.5
  Top Layer w10: D3.2 3028.07,3600 C20.2 3059.96,3505.04 3083.39,3481.61 U3.14
VCC_5V: C25.2 C61.1 C62.2 R12.1 U3.7 VR1.3 VR2.2 | length 4164.2
  Top Layer w10: R12.1 2650,3181.34 2866.34,3181.34 2885,3200 3070,3200 3083.39,3186.61 U3.7
  Top Layer w40: v1(2330,3175) 2643.66,3175 R12.1@2650,3181.34
  Bottom Layer w40: v1(2330,3175) 2305,3150 2305,1505 2410.9,1399.1 3292.76,1399.1 VR1.3 3374.49,1404.45 C61.1 3469.96,1490 3641.89,1490 VR2.2@3878.11,1490
VCC_5V1: C21.2 C27.2 D1.1 D2.1 D3.1 R12.2 | length 794.4
  Top Layer w30: C27.2 C21.2 ; R12.2 2640,3455 2549.96,3545.04 C21.2 ; D3.1 2835,3673.07 D1.1 2643.03,3673.07 C21.2
VS1: C18.1 U3.18 | length 247.4
  Top Layer w10: C18.1 2965,3445 2981.02,3428.98 U3.18
VS2: C19.1 U3.15 | length 259.6
  Top Layer w10: C19.1 2940,3555 3057.8,3437.2 U3.15
VS3: C20.1 U3.12 | length 232.7
  Top Layer w10: C20.1 3134.57,3595.47 U3.12
pads on no net: Switch.0@3784.37,1921.02 U4.25

## Polygon pours and split planes (outlines as drawn)
GND on Bottom Layer "Bottom Layer-No Net" (solid, pour order 1002): 3335,2455 3355,2475 3450,2475 3450,2470 3470,2450 3535,2385 3565,2385 3625,2385 3640,2400 3640,2480 3640,2760 3610,2790 3605,2795 3540,2795 3520,2795 3470,2745 3460,2735 3460,2605 3460,2560 3445,2545 3420,2520 3335,2520 3335,2505
GND on Bottom Layer "Bottom Layer-No Net" (solid, pour order 1003): 2880,1620 2850,1590 2850,1540 2850,1395 2885,1360 2890,1355 3360,1355 4045,1355 4125,1435 4125,1600 4095,1630 4080,1645 3960,1645 3875,1645 3860,1630 3855,1625 2995,1625

## Keep-outs
Keep-Out Layer:
  the board outline again, w10

## Other copper
Top Layer:
  rectangle net POWER+: 4590,2045 4825,2495
  rectangle net POWER+: 4430,2045 4690,3340
  rectangle net POWER+: 4590,3130 4905,3215
  rectangle net POWER+: 4255,3160 4465,3340
  rectangle net PHASE_C: 4165,2920 4350,3100
  rectangle net POWER+: 4255,2620 4460,2805
  rectangle net POWER+: 4250,2045 4475,2240
  rectangle net GND: 2825,1370 3485,1625
  rectangle net GND: 3420,1370 3930,1600
  region net PHASE_C: 4215,3285 4045,3285 4015,3255 4015,3175 3965,3125 3965,3050 4090,2925 4215,2925
  region net GND: 4810,3000 4810,2930 4740,2860 4740,2625 4790,2575 5165,2575 5210,2620 5210,2690 5035,2865 5035,3040 5025,3050 4900,3050 4885,3035
Bottom Layer:
  rectangle net NetQ4_4: 4390,2840 4455,2940
  rectangle net GND1: 4390,2975 4525,3100
  rectangle net GND1: 4390,2405 4530,2535
  rectangle net GND1: 4390,1870 4540,2000
  rectangle net GND1: 4500,1865 4700,3105
  rectangle net NetQ5_4: 4395,2280 4450,2385
  region net PHASE_C: 4215,3285 4045,3285 4015,3255 4015,3175 3965,3125 3965,3050 4090,2925 4215,2925
  region net PHASE_A: 4210,2185 4140,2185 4110,2155 4110,2120 4065,2075 4000,2075 3975,2050 3975,1920 4070,1825 4215,1825
  region net PHASE_B: 4215,2750 4150,2750 4105,2705 4045,2705 3990,2650 3990,2555 4130,2415 4130,2370 4145,2355 4260,2355 4260,2475 4215,2520
  region net GND: 4875,3180 5060,3180 5150,3105 5150,2770 5220,2700 5220,2590 5180,2550 5095,2550 5055,2510 5055,1585 4825,1355 4445,1355 4425,1375 4425,1405 4875,1855 4875,2505 4815,2565 4795,2565 4735,2625 4735,2865 4810,2940 4810,3120 4865,3175

## Silkscreen, mask and mechanical layers (free items; w line width, h text height)
Top Overlay:
  text "手电钻驱动板V0.1" at 4125,3465 h100
Top Solder:
  rectangle: 4530,2890 4655,3210
  rectangle: 4590,2070 4810,2390
  rectangle: 4475,2425 4610,2805
  rectangle: 3050,1390 3285,1615
  rectangle: 3680,1390 3890,1595
Bottom Solder:
  rectangle: 4850,2595 5070,2955
  rectangle: 4930,1735 5005,2605
  rectangle: 4510,1895 4675,3100